# EAGLE board flame sensor - Copy (EAGLE 7.6.0)
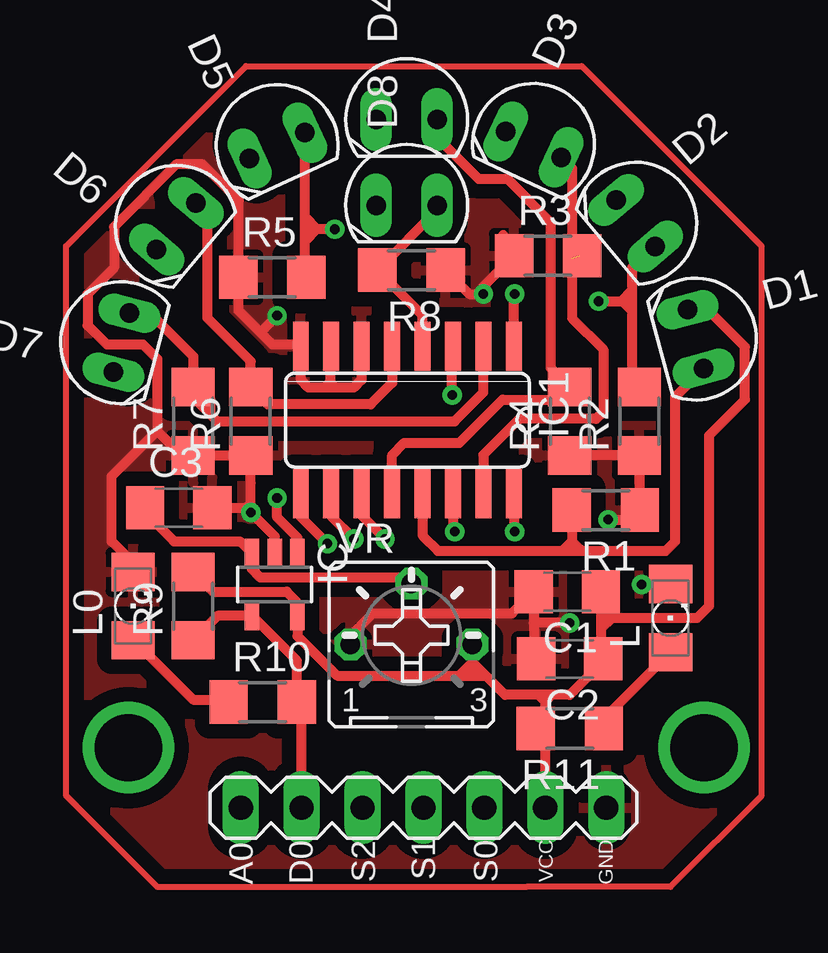
[diagram p0: board, top side]
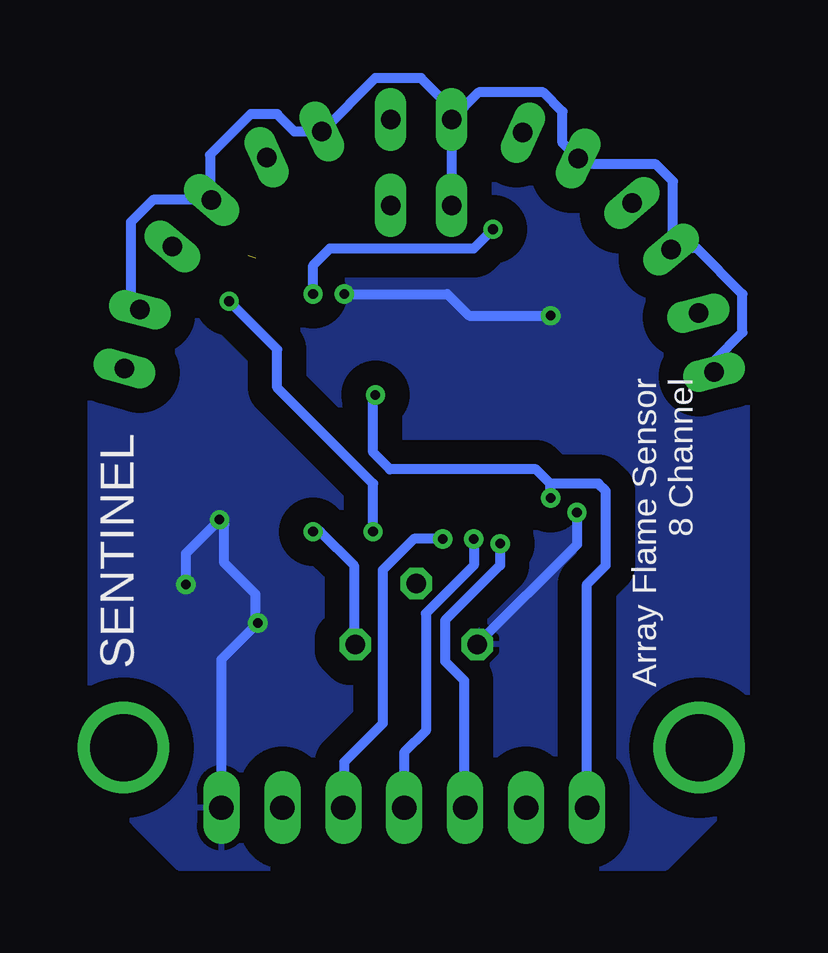
[diagram p1: board, bottom side, seen from below]

No outline drawn. Coordinates in mm, seen from the top.
Copper layers (1*16): Top 0.035mm / dielectric 1.5mm / Bottom 0.035mm
Design rules "default": minimum track width 10mil, minimum drill 24mil, track to track 8mil, track to pad 8mil, pad to pad 8mil, via to via 8mil, smd to smd 8mil, copper to edge 40mil, drill to drill 8mil, minimum pad ring 10mil, minimum via ring 8mil, stop-mask expansion 4mil, vias tented up to drill 0mil, thermal gap 10mil

## Footprints (pad centres in the part's own frame; a part is rotated, then mirrored left to right if it is on the bottom)
C1206 = smd 1.6 x 1.8: 1 -1.4,0; 2 1.4,0
SFH205 = drill 0.813 long: A 0,-1.27; K 0,1.27
SOT23-5 = smd 0.6 x 1.2: 1 -0.95,-1.306; 2 0,-1.306; 3 0.95,-1.306; 4 0.95,1.306; 5 -0.95,1.306
SO16 = smd 0.66 x 2.032: 1 -4.445,-3.073; 2 -3.175,-3.073; 3 -1.905,-3.073; 4 -0.635,-3.073; 5 0.635,-3.073; 6 1.905,-3.073; 7 3.175,-3.073; 8 4.445,-3.073; 9 4.445,3.073; 10 3.175,3.073; 11 1.905,3.073; 12 0.635,3.073; 13 -0.635,3.073; 14 -1.905,3.073; 15 -3.175,3.073; 16 -4.445,3.073
LED_1206 = smd 1.6 x 1.803: A -1.422,0; C 1.422,0
R1206 = smd 1.6 x 1.803: 1 -1.422,0; 2 1.422,0
MA07-1 = drill 1.016 long: 1 -7.62,0; 2 -5.08,0; 3 -2.54,0; 4 0,0; 5 2.54,0; 6 5.08,0; 7 7.62,0
B25P = drill 0.813 octagon: A -2.54,0; E 2.54,0; S 0,2.54

## Placement (x,y rotation side)
C1  [C1206]  20.4,16.1 180 top
C2  [C1206]  20.5,13.3 180 top
C3  [C1206]  4.2,19.6 0 top
D1  [SFH205]  25.74,26.63 15 top
D2  [SFH205]  23.25,31.45 40 top
D3  [SFH205]  18.99,34.74 65 top
D4  [SFH205]  13.7,35.77 90 top
D5  [SFH205]  8.3,34.69 115 top
D6  [SFH205]  4.09,31.33 140 top
D7  [SFH205]  1.81,26.48 165 top
D8  [SFH205]  13.7,32.2 90 top
IC  [SOT23-5]  8.2,16.4 180 top
IC1  4051D  [SO16]  13.73,23.25 180 top
L  [LED_1206]  24.7,15 90 top
L0  [LED_1206]  2.3,15.5 90 top
R1  33K  [R1206]  22,19.5 180 top
R2  33K  [R1206]  23.4,23.2 90 top
R3  33K  [R1206]  19.6,30.1 0 top
R4  33K  [R1206]  20.5,23.2 90 top
R5  33K  [R1206]  8.1,29.2 0 top
R6  33K  [R1206]  7.2,23.2 90 top
R7  33K  [R1206]  4.8,23.2 90 top
R8  33K  [R1206]  13.9,29.5 180 top
R9  3K6  [R1206]  4.8,15.5 90 top
R10  1K  [R1206]  7.7,11.5 0 top
R11  1K  [R1206]  20.5,10.4 180 top
SV1  [MA07-1]  14.4,7.1 180 top
VR  [B25P]  13.9,13.9 0 top

## Library data of the parts
C1-C3 = eagle-ltspice; SPICEMODEL: NONE; SPICEPREFIX: C
D1-D8 = opto-trans-siemens; OC_FARNELL: unknown; OC_NEWARK: unknown
IC = linear
IC1 = 40xx
L L0 = eagle-ltspice; SPICEMODEL: NONE; SPICEPREFIX: D; SPICETYPE: diode
R1-R11 = eagle-ltspice; SPICEMODEL: NONE; SPICEPREFIX: R
SV1 = con-lstb; OC_FARNELL: unknown; OC_NEWARK: unknown
VR = pot

## Nets
GND: C1.2 C2.2 C3.2 IC1.6 IC1.8 IC.2 L0.C L.C R1.1 R2.1 R3.1 R4.1 R5.1 R6.1 R7.1 R8.1 SV1.1 VR.A
N$1: D7.A IC1.2 R7.2
N$2: D6.A IC1.5 R6.2
N$3: D5.A IC1.1 R5.2
N$4: D4.A IC1.12 R4.2
N$5: D3.A IC1.15 R3.2
N$6: D2.A IC1.14 R2.2
N$7: D1.A IC1.13 R1.2
N$9: IC1.3 IC.1 SV1.7
N$10: IC1.9 SV1.5
N$11: IC1.10 SV1.4
N$12: IC.4 R9.1 R10.2 SV1.6
N$14: C3.1 IC.3 VR.S
N$16: L0.A R10.1
N$17: IC1.11 SV1.3
N$18: L.A R11.1
R7: D8.A IC1.4 R8.2
VCC: C1.1 C2.1 D1.K D2.K D3.K D4.K D5.K D6.K D7.K D8.K IC1.16 IC.5 R9.2 R11.2 SV1.2 VR.E
VEE: IC1.7

## Tracks (layer width: path | path; a pad name or v marks a point on that pad's centre or on a via)
GND  (via drill 0.4)
  Top 0.406: 9.26,26.3 IC1.8 | 7.55,26.95 6.68,27.82 R5.1 6.7,29.22 6.7,32.4 5.2,33.9 4.1,33.9 1.5,31.3 1.5,29.6 0.4,28.5 0.4,27.2 1.2,26.4 2.7,26.4 3.3,25.8 3.3,22.8 | 7.55,26.95 8.1,26.4 9.21,26.4 IC1.8 | IC1.6 11.82,24.93 11.5,24.6 10.75,24.6 | 10.75,24.6 10.5,24.6 | 10.5,24.6 10.25,24.6 | 10.25,24.6 9.6,24.6 9.3,24.9 9.3,26.31 IC1.8 | R4.1 R2.1 23.4,19.52 R1.1 23.02,19.1 v22.1,19.1 | 17.72,30.96 R3.1 16.9,28.82 v16.9,28.5 16.32,28.5 R8.1 15.32,29.64 | 19,14.8 C1.2 18.1,15.2 12.3,15.2 11.36,14.26 VR.A | 19,14.8 19,13.4 C2.2 | v7.2,19.4 R6.1 R7.1 4.32,21.78 3.3,22.8 | v8.3,27.6 7.65,26.95 7.55,26.95 | v20.5,14.8 19,14.8 | IC.2 8.2,18.4 v7.2,19.4 | C3.2 7,19.6 v7.2,19.4 | L0.C 2.3,17.3 1.4,18.2 1.4,20.9 3.3,22.8 | L.C 23.52,16.42 v23.5,16.4 | 10.5,26.1 10.5,24.85 | 10.5,24.85 10.5,24.6 | 10.25,24.6 10.5,24.85 | 10.5,24.85 10.75,24.6
  Bottom 0.406: v16.9,28.5 12.6,28.5 11.7,27.6 v8.3,27.6 | v7.2,19.4 7.2,18.06 VR.A | SV1.1 22.02,13.28 v20.5,14.8 20.6,14.9 20.6,16 21.9,17.3 21.9,18.9 v22.1,19.1 23.5,17.7 v23.5,16.4
  pour Bottom (isolate 1.016): 3.5,4.6 0.1,8 0.1,30.1 7.4,37.4 20.8,37.4 27.5,30.7 27.5,8.3 23.8,4.6
  pour Top (isolate 0.61): 0.1,8 3.6,4.5 24.4,4.5 27.5,7.6 27.5,30.2 20.5,37.2 7.4,37.2 0.1,29.9
N$1
  Top 0.406: D7.A 3,27.7 4.8,25.9 R7.2 5.12,24.3 5.12,23.88 5.8,23.2 15.7,23.2 16.9,24.4 IC1.2
N$2
  Top 0.406: IC1.5 13.1,24.8 12.2,23.9 7.92,23.9 R6.2 7.2,25.7 5.4,27.5 5.4,31.81 D6.A
N$3  (via drill 0.4)
  Top 0.406: D5.A 9.45,31.3 | 9.45,31.3 9.45,29.27 R5.2 | IC1.1 18.18,28.48 v18.2,28.5 | v10.7,31.2 9.95,31.2 | 9.95,31.2 9.55,31.2 9.45,31.3 | 9.95,31.2 9.5,31.65 | 9.95,31.2 9.5,30.75
  Bottom 0.406: v18.2,28.5 18.2,29.7 17.5,30.4 11.5,30.4 v10.7,31.2
N$4
  Top 0.406: IC1.12 13.1,21.8 13.6,22.3 15.9,22.3 17.7,24.1 20.2,24.1 20.5,24.4 R4.2 19.7,25.42 19.7,31.5 17.9,33.3 16.7,33.3 14.97,35.03 D4.A
N$5  (1 unrouted)
  Top 0.406: 20.6,30 20.6,27.5 21.9,26.2 21.9,23.6 21.6,23.3 18.4,23.3 16.9,21.8 IC1.15 | D3.A 20.6,33.74 20.6,30.4 20.9,30.1 R3.2
N$6  (via drill 0.4)
  Top 0.406: D2.A 23.98,30.48 23.1,29.6 23.1,28.65 | 23.1,28.65 23.1,28.3 | 23.1,28.3 23.1,27.8 | 23.1,27.8 23.1,24.92 R2.2 | IC1.14 15.63,18.66 v15.7,18.6 | v21.7,28.2 22.5,28.2 22.65,28.2 | 22.65,28.2 23,28.2 23.1,28.3 | 22.65,28.2 23.1,28.65 | 22.6,28.2 22.7,28.2 23.1,27.8
  Bottom 0.406: v15.7,18.6 15.7,20.6 19.7,24.6 19.7,26.2 v21.7,28.2
N$7
  Top 0.406: R1.2 20.6,19.48 20.6,18.2 | IC1.13 14.37,18.43 15,17.8 20.2,17.8 | 20.2,17.8 20.5,17.8 | 20.6,18.2 20.6,17.9 20.5,17.8 | 20.5,17.8 24.5,17.8 24.9,18.2 24.9,24.23 D1.A | 20.2,17.8 20.6,18.2 | 20.6,18.2 20.95,17.85
N$8  (via drill 2.8 pad 3)
  other vias: 26.1,9.6
N$9  (via drill 0.4)
  Top 0.406: IC.1 9.15,18.35 8.3,19.2 v8.3,20 | v15.6,24.3 15.6,26.29 IC1.3
  Bottom 0.406: v8.3,20 8.3,20.6 | 8.3,20.6 8.9,21.2 15,21.2 15.7,21.9 15.7,24.2 v15.6,24.3 | SV1.7 6.78,16.42 6,17.2 6,20.3 6.3,20.6 8.3,20.6
N$10  (via drill 0.4)
  Top 0.406: IC1.9 9.29,19.21 v10.4,18.1
  Bottom 0.406: v10.4,18.1 10.4,17.2 12.7,14.9 12.7,13.2 11.9,12.4 11.9,7.14 SV1.5
N$11  (via drill 0.4)
  Top 0.406: IC1.10 10.55,19.25 v11.5,18.3
  Bottom 0.406: v11.5,18.3 11.5,17.2 13.5,15.2 13.5,10.3 14.4,9.4 SV1.4
N$12
  Top 0.406: R9.1 5.82,15.09 IC.4 9.12,13.22 R10.2 9.32,11.3 SV1.6
N$14
  Top 0.406: VR.S 13.64,16.7 7.6,16.7 7.25,17.05 IC.3 6.76,18.2 4,18.2 2.8,19.4 C3.1
N$16
  Top 0.406: L0.A 2.32,14.08 4.8,11.6 6.18,11.6 R10.1
N$17  (via drill 0.4)
  Top 0.406: IC1.11 11.82,19.27 v12.8,18.3
  Bottom 0.406: v12.8,18.3 14,18.3 15.3,17 15.3,10.6 16.9,9 16.9,7.14 SV1.3
N$18
  Top 0.406: R11.1 21.92,10.8 L.A
N$19
  Top 0.254: 28.5,7.6 28.5,30.5 21,38 7,38 -0.5,30.5 -0.5,7.6 3.3,3.8 18.6,3.8 18.7,3.8 24.7,3.8 28.5,7.6
N$20  (via drill 2.8 pad 3)
  other vias: 2.1,9.6
N$21
  Top 0.406: 5.5,24.15 5.5,23.55
R7
  Top 0.406: IC1.4 14.37,27.61 R8.2 14.97,31.99 D8.A
VCC  (via drill 0.4)
  Top 0.406: 9.15,15.55 IC.5 | IC.5 9.1,15.14 9.1,15.7 8.7,16.1 5.62,16.1 R9.2 | C1.1 21.8,15 | 21.8,15 21.8,14.6 | 21.8,14.6 21.8,13.4 C2.1 21.9,13.2 20.5,11.8 19.6,11.8 | VR.E 16.44,13.16 | 16.44,13.16 16.8,12.8 | 16.8,12.8 17,12.6 | 17,12.6 17.8,11.8 19.2,11.8 | IC1.16 18.18,18.62 v18.2,18.6 | D1.K 25.46,27.9 26.2,27.9 27.8,26.3 27.8,24.1 26.3,22.6 26.3,15.5 25.8,15 22.25,15 | 19.6,11.8 19.2,11.8 | SV1.2 19.48,10.2 | 19.48,10.2 19.48,11.68 19.6,11.8 | R11.2 19.28,10.4 19.48,10.2 | IC.5 9.15,14.25 10.8,12.6 15.88,12.6 | 15.88,12.6 16.44,13.16 | 22.25,15 21.8,15 | 16.1,12.8 16.8,12.8 | 15.88,12.6 17,12.6 | 19.2,11.8 19.45,11.55 19.5,11.55 19.7,11.75 | 21.8,14.6 21.85,14.6 22.25,15
  Bottom 0.406: D7.K 1.48,25.72 0.3,26.9 0.3,28.5 2.2,30.4 3.23,30.4 D6.K 3.2,30.43 3.2,33.2 3.9,33.9 6.9,33.9 D5.K 7.8,34.8 7.8,36.1 8.6,36.9 11.3,36.9 D4.K | D4.K 12.43,36.23 13.7,37.5 15.61,37.5 D3.K 18.97,35.27 19.7,36 20.8,36 22.5,34.3 22.5,32.49 D2.K 24.87,32.43 25.8,31.5 25.8,28.24 D1.K | D4.K D8.K | v18.2,18.6 17.9,18.6 16.5,17.2 16.5,13.96 VR.E

## Text on the board
tPlace: A0 | D0 | S2 | S1 | S0 | VCC | GND
bPlace: Array Flame Sensor / 8 Channel | SENTINEL